# Altium PCB PCB1.PcbDoc
Units mm, origin at the board's own origin, x right, y up, seen from the top; angles counter-clockwise.
Board outline 152.4 x 101.6 mm, 2 copper layers (Top Layer, Bottom Layer); 47 components, 40 nets, 216 pads, 33 vias.
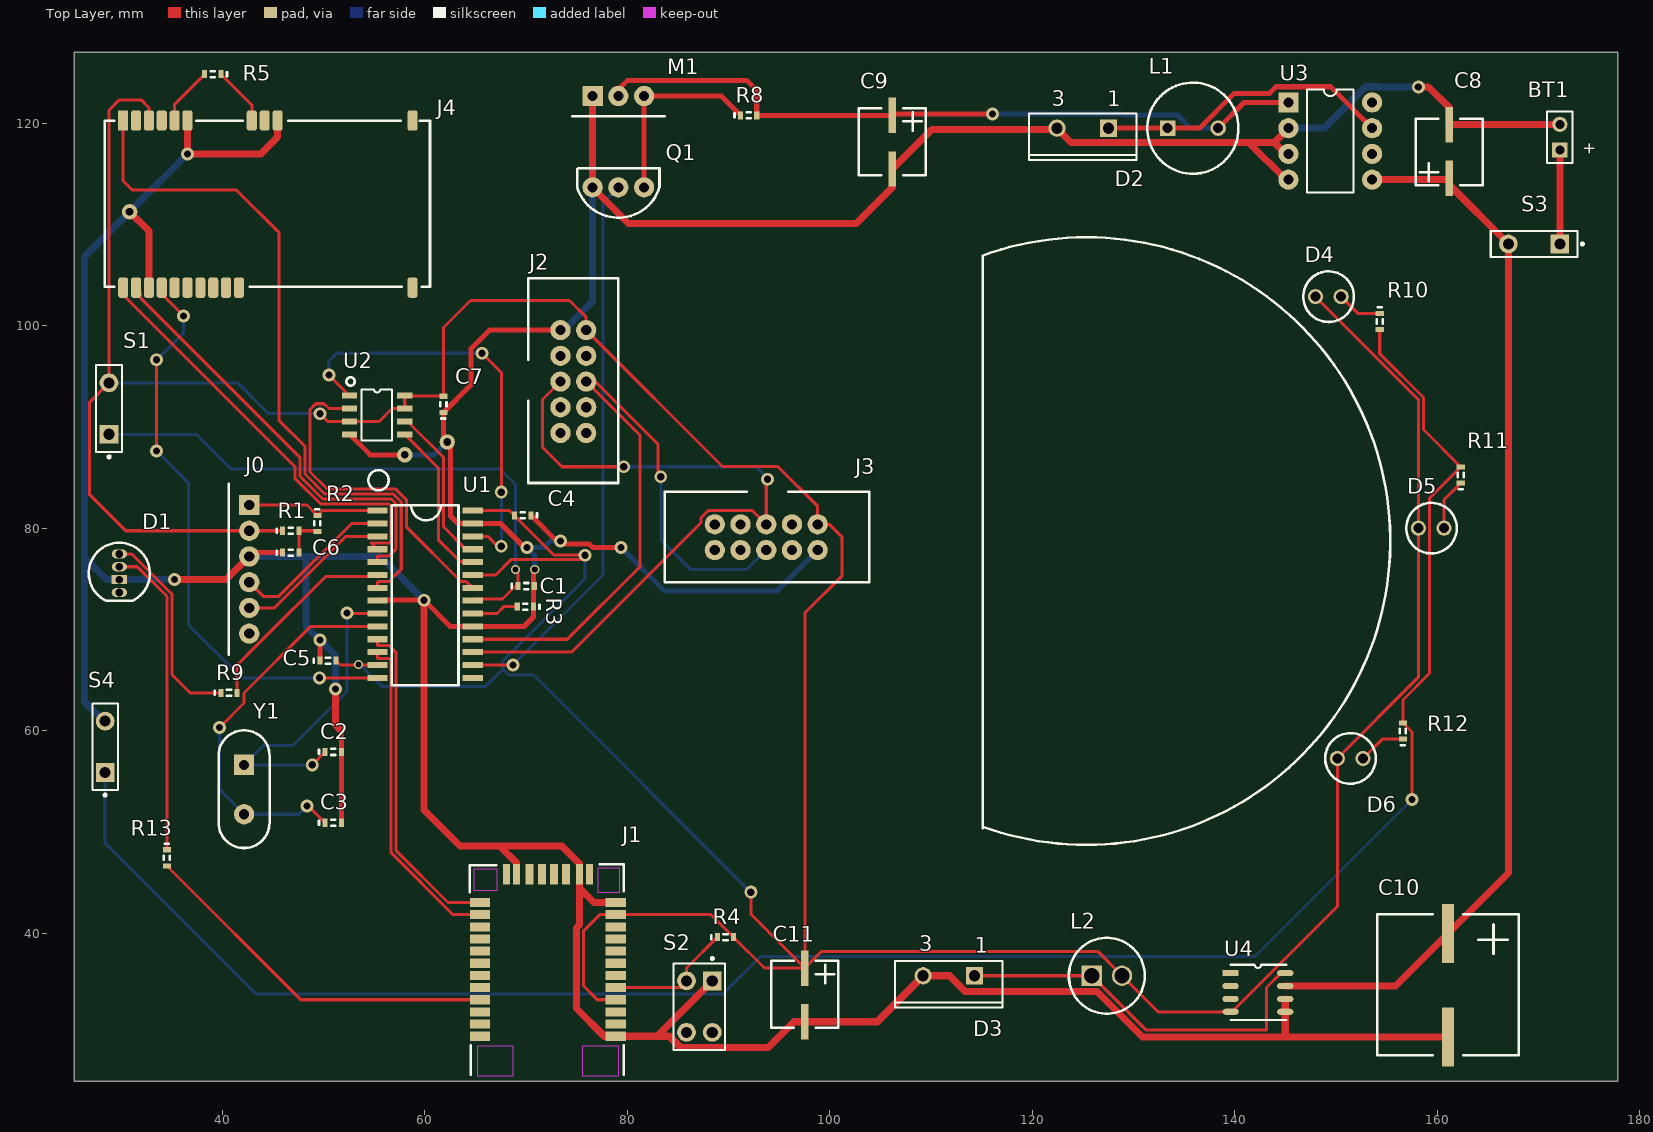
[diagram p0: Top Layer view]
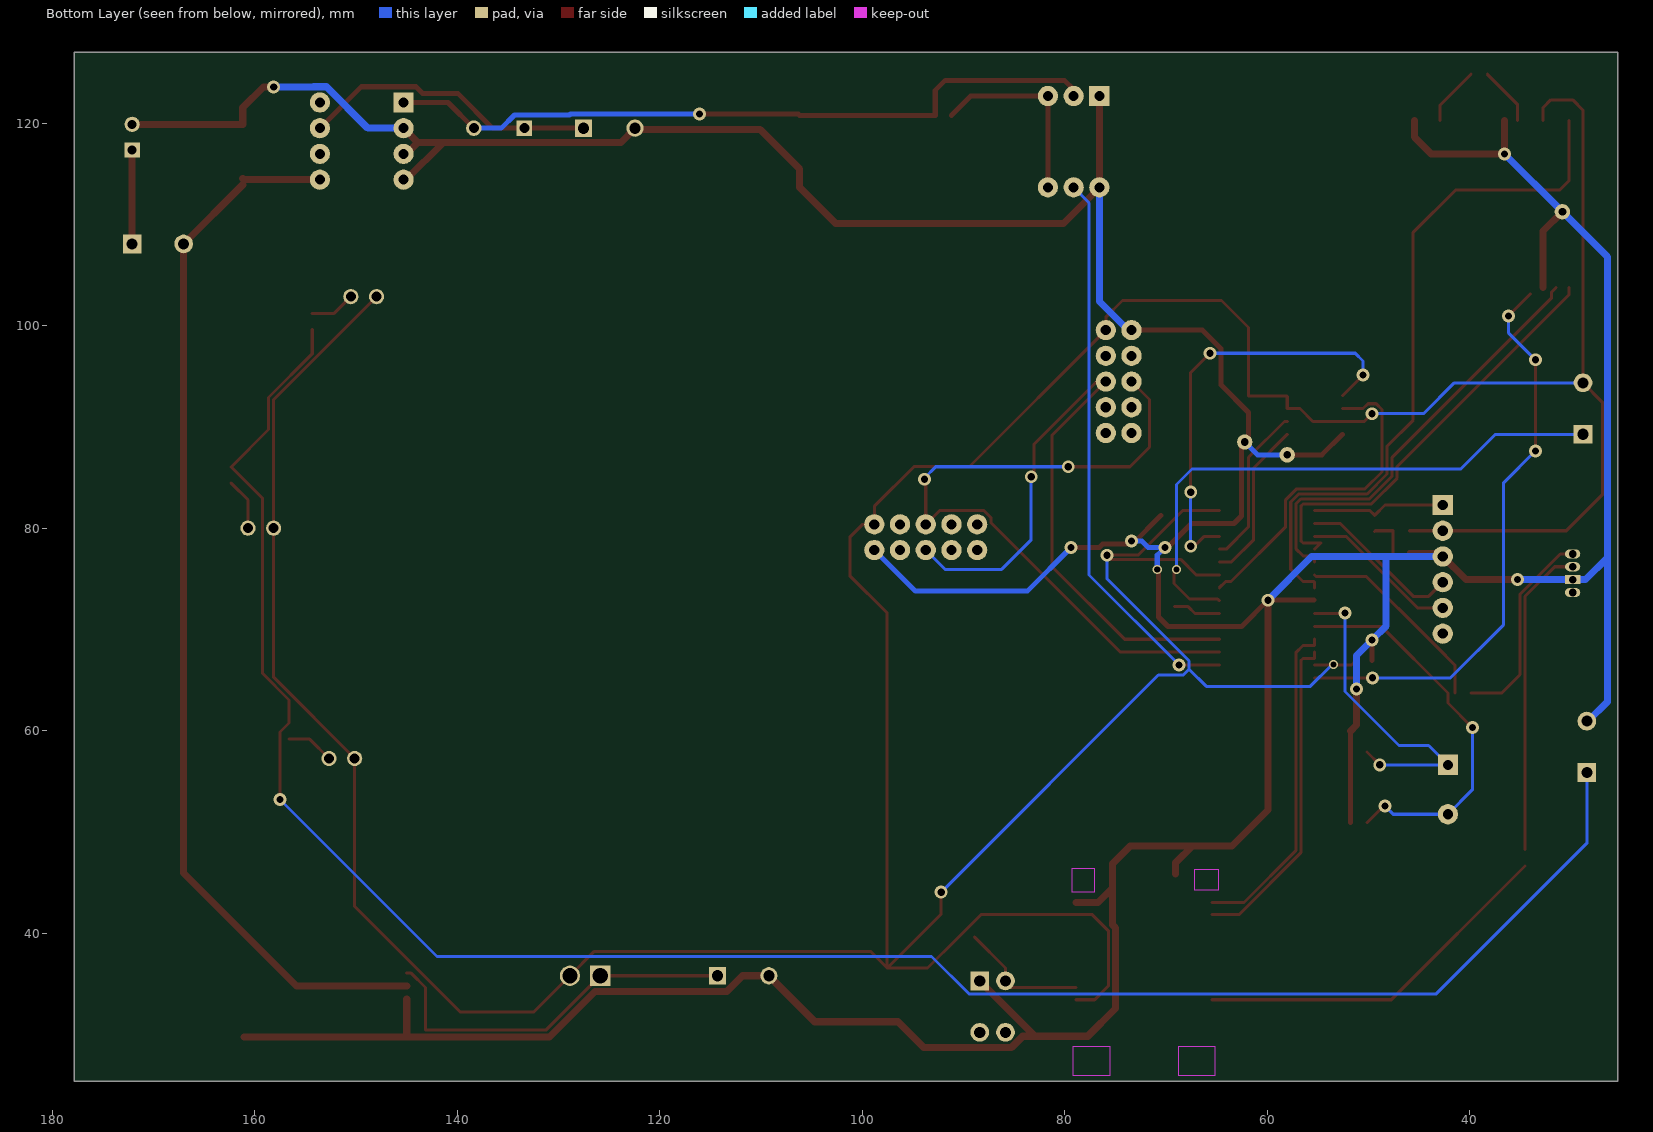
[diagram p1: Bottom Layer view, seen from below]

## Layer stack, top to bottom
Top Solder: solder mask 0.0102, Solder Resist, Dk 3.5
Top Layer: signal copper 0.0356
Dielectric 1: dielectric 0.32, FR-4, Dk 4.8
Bottom Layer: signal copper 0.0356
Bottom Solder: solder mask 0.0102, Solder Resist, Dk 3.5

## Board outline
25.4,25.4 177.8,25.4 177.8,127 25.4,127

## Design rules (kind name [scope] priority, off if disabled: settings)
Clearance [All] p1: gap=0.2
HoleSize [All] p1: absolutevalues=TRUE maxlimit=2.54 minlimit=0.3 maxpercent=80.000 minpercent=20.000
PolygonConnect [All] p1: connectstyle=Relief reliefconductorwidth=0.254 reliefentries=4 polygonreliefangle="90 Angle" airgapwidth=0.254
RoutingVias [All] p1: holewidth=0.711 width=1.27 viastyle="Through Hole" minholewidth=0.3 minwidth=1.27 maxholewidth=1 maxwidth=1.27
SilkToSilkClearance [All] p1: silktosilkclearance=0.2
SolderMaskExpansion [All] p1: expansion=0.102
UnpouredPolygon [All] p1: allowunpoured=FALSE
Width [All] p1: maxlimit=0.7 minlimit=0.2 preferedwidth=0.7
27 further rules are at their usual default settings.

## Classes and differential pairs
component class Accelerometer/Gyroscope/Magnetometer: J2 J3
component class Bluetooth: J1 R4 S2
component class Flash: C7 U2
component class GPS: J4 R5
component class "LED RGB": D1 D4 D5 D6 R9 R10 R11 R12 R13 S4
component class PIC32: C1 C2 C3 C4 C5 C6 J0 R1 R2 R3 S1 U1 Y1
component class POWER: BT1 C8 C9 C10 C11 D2 D3 L1 L2 S3 U3 U4
component class ServoMotor: M1 Q1 R8

## Components (designator, comment, footprint, x,y, rotation, side; value= is the part's Value field where it differs from the comment)
BT1 "6V" BAT-2 172.085,118.618 r90 top
C1 "10μF" own_0603 70.739,72.263 r180 top
C2 "15pF" own_0603 50.165,57.912 r0 top
C3 "15pF" own_0603 50.165,50.927 r0 top
C4 "0.1μF" own_0603 70.485,81.28 r180 top
C5 "0.1μF" own_0603 49.657,66.929 r0 top
C6 "0.1μF" own_0603 45.974,77.597 r0 top
C7 "100nF" own_0603 61.849,91.44 r90 top
C8 "Cin" SMT-FKS-V-D8 161.163,114.554 r180 top
C9 "Cout" SMT-FK-V-D8 106.172,120.777 r0 top
C10 "Cin" SMT-FK-V-H13 161.036,39.878 r0 top
C11 "Cout" SMT-FKS-V-D8 97.536,36.576 r0 top
D1 "L-154A4SUREQBFZGEW" L-154A4SUREQBFZGEW 29.845,73.66 r180 top
D2 "1N5817" TO-220AC 124.968,119.507 r180 top
D3 "1N5817" TO-220AC 111.76,35.814 r180 top
D4 "LED3" LED2.5 147.955,102.87 r0 top
D5 "LED3" LED2.5 158.115,80.01 r0 top
D6 "LED3" LED2.5 150.114,57.277 r0 top
J0 "Program / Debug" "C-Grid III X6" 42.672,82.296 r270 top
J1 "RN42" RN42 78.867,29.845 r180 top
J2 "MOD-MPU9150" "UEXT_MALE x10" 73.406,99.568 r0 top
J3 "MAG3110 Breakout" "UEXT_MALE x10" 98.806,80.391 r270 top
J4 "A2035-H" A2035-H 30.226,103.759 r90 top
L1 "Inductor" RLB0914 133.35,119.507 r0 top
L2 "Inductor" "2200R Series" 125.857,35.814 r0 top
M1 "SG90" "C-Grid III x3" 76.581,122.682 r0 top
Q1 "MOSFET-2N7000" 2N7000 81.661,113.665 r270 top
R1 "10k" own_0603 45.974,79.756 r0 top
R2 "1k" own_0603 49.403,81.28 r270 top
R3 "1k" own_0603 69.215,74.295 r0 top
R4 "10k" own_0603 88.9,39.624 r0 top
R5 "10K" own_0603 39.878,124.841 r180 top
R8 "5k" own_0603 91.186,120.777 r0 top
R9 "330" own_0603 39.878,63.754 r0 top
R10 "Res1" own_0603 154.305,101.219 r270 top
R11 "Res1" own_0603 162.306,84.455 r90 top
R12 "Res1" own_0603 156.591,59.182 r90 top
R13 "330" own_0603 34.544,48.26 r270 top
S1 "SW-PB" SPST-2 28.829,91.821 r90 top
S2 "Switch" DPST-4 87.122,32.766 r270 top
S3 "SW-SPST" SPST-2 169.545,108.077 r180 top
S4 "SW-SPST" SPST-2 28.448,58.42 r90 top
U1 "PIC32MX250F128B" PIC32MX250F128/SO 56.134,82.042 r270 top
U2 "LE25U40CMD" LE25U40CMDTWG 52.578,93.091 r0 top
U3 "LM2574N-5.0/NOPB" DIP8 145.288,122.047 r0 top
U4 "LM2594MX-3.3" SOP8 139.573,36.068 r0 top
Y1 "8MHz" 9B-8.000MAAJ-B 42.164,56.642 r270 top

## Footprints (in the part's own frame and the unit in brackets; to place one, negate y for a bottom-side part, rotate by r counter-clockwise, add the part's x,y. Pads: shape width x height; smd on the part's side, far side on the other; paste and mask are expansions set on the pad)
2N7000 [mm]
  round 2 hole 1: 1(0,0) 2(0,-2.54) 3(0,-5.08)
  silkscreen extent -1.9,-6.6 3,1.52
9B-8.000MAAJ-B [mm] "Quartz 8MHz"
  rect 2x2 hole 1: 1(0,0)
  round 2 hole 1: 2(4.88,0)
  silkscreen extent -3.41,-2.52 8.21,2.52
"2200R Series" [mm]
  rect 2x2 hole 1.5: 1(0,0)
  round 2 hole 1.5: 2(3,0)
  silkscreen extent -2.25,-3.75 5.25,3.75
A2035-H [mm]
  rect 2x1 smd: 1(16.51,0)
  rrect50% 2x1 smd: 2(16.51,-1.27) 3(16.51,-2.54) 4(16.51,-3.81) 5(16.51,-5.08) 6(16.51,-6.35) 7(16.51,-12.7) 8(16.51,-13.97) 9(16.51,-15.24) 10(16.51,-28.575) 11(0,-28.575) 12(0,-11.43) 13(0,-10.16) 14(0,-8.89) 15(0,-7.62) 16(0,-6.35) 17(0,-5.08) 18(0,-3.81) 19(0,-2.54) 20(0,-1.27) 21(0,0)
  silkscreen extent 0.1,-30.3 16.5,1.8
BAT-2 [mm] "Battery; 2 Leads"
  rect 1.5x1.5 hole 0.9: 1(-1.27,0)
  round 1.5 hole 0.9: 2(1.27,0)
  silkscreen extent -2.54,-1.27 2.54,1.27
"C-Grid III x3" [mm]
  rect 2x2 hole 1: 1(0,0)
  round 2 hole 1: 2(2.54,0) 3(5.08,0)
  silkscreen extent -2,-2 7.1,-2
"C-Grid III X6" [mm]
  rect 2x2 hole 1: 1(0,0)
  round 2 hole 1: 2(2.54,0) 3(5.08,0) 4(7.62,0) 5(10.16,0) 6(12.7,0)
  silkscreen extent -2.1,-2 14.8,-2
DIP8 [mm]
  rect 2x2 hole 1: 1(0,0)
  round 2 hole 1: 2(0,-2.54) 3(0,-5.08) 4(0,-7.62) 5(8.26,-7.62) 6(8.26,-5.08) 7(8.26,-2.54) 8(8.26,0)
  silkscreen extent 1.84,-8.89 6.43,1.27
DPST-4 [mm] "Switch; 4 Leads"
  rect 1.85x1.85 hole 1.1: 1(-2.54,1.27)
  round 1.85 hole 1.1: 2(-2.54,-1.27) 3(2.54,-1.27) 4(2.54,1.27)
  silkscreen extent -4.88,-2.54 4.28,2.54
L-154A4SUREQBFZGEW [mm] "LED RGB"
  oval 1.5x0.9 hole 0.762: 1(0,0) 3(0,-2.54) 4(0,-3.81)
  rect 1.5x0.9 hole 0.762: 2(0,-1.27)
  silkscreen extent -3.01,-4.91 3.01,0.82
LE25U40CMDTWG [mm]
  rect 1.5x0.6 smd: 1(0,0) 2(0,-1.27) 3(0,-2.54) 4(0,-3.81) 5(5.45,-3.81) 6(5.45,-2.54) 7(5.45,-1.27) 8(5.45,0)
  silkscreen extent -0.31,-4.44 4.2,1.81
LED2.5 [mm] "LED"
  round 1.5 hole 1: 1(0,0) 2(2.54,0)
  silkscreen extent -1.2,-2.5 3.8,2.5
own_0603 [mm] "0603_fp"
  rect 0.5x0.8 smd: 1(0,0) 2(1.6,0)
  silkscreen extent -0.6,-0.3 1,0.3
PIC32MX250F128/SO [mm]
  rect 0.6x2 smd: 1(0.3,-0.8) 2(1.57,-0.8) 3(2.84,-0.8) 4(4.11,-0.8) 5(5.38,-0.8) 6(6.65,-0.8) 7(7.92,-0.8) 8(9.19,-0.8) 9(10.46,-0.8) 10(11.73,-0.8) 11(13,-0.8) 12(14.27,-0.8) 13(15.54,-0.8) 14(16.81,-0.8) 15(16.81,8.6) 16(15.54,8.6) 17(14.27,8.6) 18(13,8.6) 19(11.73,8.6) 20(10.46,8.6) 21(9.19,8.6) 22(7.92,8.6) 23(6.65,8.6) 24(5.38,8.6) 25(4.11,8.6) 26(2.84,8.6) 27(1.57,8.6) 28(0.3,8.6)
  silkscreen extent -3.7,-1.7 17.55,7.2
RLB0914 [mil]
  rect 60x60 hole 39.37: 1(0,0)
  round 60 hole 39.37: 2(196.85,0)
  silkscreen extent -79,-177 276,177
RN42 [mm]
  rect 2x0.9 smd: 1(0,0) 2(0,-1.2) 3(0,-2.4) 4(0,-3.6) 5(0,-4.8) 6(0,-6) 7(0,-7.2) 8(0,-8.4) 9(0,-9.6) 10(0,-10.8) 11(0,-12) 12(0,-13.2) 13(13.4,-13.2) 14(13.4,-12) 15(13.4,-10.8) 16(13.4,-9.6) 17(13.4,-8.4) 18(13.4,-7.2) 19(13.4,-6) 20(13.4,-4.8) 21(13.4,-3.6) 22(13.4,-2.4) 23(13.4,-1.2) 24(13.4,0)
  rect 0.7x2 smd: 28(9.8,-16) 29(3.6,-16) 30(10.8,-16) 35(2.6,-16)
  rect 0.8x2 smd: 31(8.5,-16) 32(7.3,-16) 33(6.1,-16) 34(4.9,-16)
  Keep-Out Layer region: 10.1,1 13.7,1 13.7,3.9 10.1,3.9
  Keep-Out Layer region: -0.3,1 3.3,1 3.3,3.9 -0.3,3.9
  Keep-Out Layer region: 11.7,-16.5 14,-16.5 14,-14.4 11.7,-14.4
  Keep-Out Layer region: -0.4,-16.6 1.8,-16.6 1.8,-14.2 -0.4,-14.2
  silkscreen extent -0.8,-17 14.4,3.8
SMT-FK-V-D8 [mm]
  rect 0.75x3.5 smd: 1(0,0) 2(0,-5.3)
  silkscreen extent -3.3,-5.9 3.3,0.7
SMT-FK-V-H13 [mm]
  rect 1.2x5.8 smd: 1(0,0.1) 2(0,-10.1)
  silkscreen extent -7,-11.9 7,2
SMT-FKS-V-D8 [mm]
  rect 0.75x3.5 smd: 1(0,0) 2(0,-5.3)
  silkscreen extent -3.3,-5.9 3.3,0.7
SOP8 [mm]
  rect 1.6x0.6 smd: 1(0,0)
  oval 1.6x0.6 smd: 2(0,-1.27) 3(0,-2.54) 4(0,-3.81) 5(5.4,-3.81) 6(5.4,-2.54) 7(5.4,-1.27) 8(5.4,0)
  silkscreen extent 0,-4.6 5.5,0.83
SPST-2 [mm] "Switch; 2 Leads"
  rect 1.85x1.85 hole 1.1: 1(-2.54,0)
  round 1.85 hole 1.1: 2(2.54,0)
  silkscreen extent -4.89,-1.27 4.28,1.27
TO-220AC [mm] "TO, Thru-Hole, Vertical, Heatsink Mounted; 3 In-Line Leads (1 Absent); Pitch 2.54 mm"
  rect 1.7x1.7 hole 1.1: 1(-2.54,0)
  round 1.7 hole 1.1: 3(2.54,0)
  silkscreen extent -5.3,-1.45 5.3,3.15
"UEXT_MALE x10" [mm]
  round 2 hole 1: 1(0,0) 2(2.54,0) 3(0,-2.54) 4(2.54,-2.54) 5(0,-5.08) 6(2.54,-5.08) 7(0,-7.62) 8(2.54,-7.62) 9(0,-10.16) 10(2.54,-10.16)
  silkscreen extent -3.2,-15.1 5.7,5.1

## Part data
BT1: library part Battery, "4xAA"
C1 C2 C3 C4 C5 C6 C7: library part Cap, "Capacitor"
C8 C9 C10 C11: library part "Cap Pol1", "Polarized Capacitor (Radial)"
D1: "LED RGB"
D2 D3: library part "Diode 10TQ035", "Schottky Rectifier"
D4 D5 D6: "Typical BLUE SiC LED"
J0: library part ICSP
J1: "Bluetooth Module"
J2: "9-Axis"
J3: library part MOD-MAG3110
J4: "GPS Module"
M1: "Servo motor"
Q1: library part MOSFET-N, "N-Channel MOSFET"
R1 R2 R3 R4 R5 R8 R9 R13: library part Res1, "Resistor"
R10 R11 R12: "Resistor"
S1: "Switch"
S2: library part SW-PB, "Reset"
S3 S4: "Single-Pole, Single-Throw Switch"
U1: "Microcontrolleur"
U2: "Flash memory"
U3: "5V Buck converter"
U4: "3.3V Buck converter"
Y1: library part XTAL, "Crystal Oscillator"

## Free pads (board coordinates)
  round 1.524 hole 0.762: 2(30.861,111.252) 3(62.23,88.519) 4(58.039,87.249)

## Via types
v1: diameter 1.27, hole 0.711, Top Layer to Bottom Layer, 30 vias
v2: diameter 0.9, hole 0.6, Top Layer to Bottom Layer, 3 vias

## Nets (pads, with @x,y where several pads share a name; then routed paths per layer and width w, separated by ;. In a path a pad name is that pad's centre, name@x,y a point inside that pad or via, vN(x,y) a via of type N, cw(c..) or ccw(c..) an arc to the next point about the centre after c; other vN are vias at no path point)
GND: BT1.2 C1.1 C2.2 C3.2 C4.1 C5.1 C6.1 C7.1 C8.2 C9.2 C10.2 C11.2 D1.2 D2.3 D3.3 J0.3 J1.1 J1.12 J1.28 J1.29 J2.1 J3.2 J4.6 J4.9 J4.19 M1.1 pad.2 pad.3 pad.4 Q1.3 R3.2 S2.1 S4.2 U1.8 U1.19 U1.27 U2.4 U3.2 U3.3 U3.4 U4.5 U4.6 | length 565.7
  Top Layer w0.5: J0.3@43.053,77.597 C6.1 ; C5.1 v1(49.657,68.961) ; C3.2 C2.2 51.765,59.995 ; U2.4 54.61,87.249 pad.4 ; U1.8@55.38,72.898 v1(59.944,72.898) 62.53,70.312 U1.19 69.804,70.312 70.739,71.247 C1.1 70.739,75.819 v2(70.866,75.946) ; v1(70.104,78.105) 69.861,78.105 67.494,80.472 U1.27 63.292,80.472 62.549,81.215 62.549,87.995 61.849,88.695 C7.1 64.574,94.165 64.574,97.731 66.411,99.568 J2.1 ; C4.1 73.337,78.428 76.268,78.428 76.591,78.105 v1(79.375,78.105)
  Top Layer w0.7: pad.2 32.766,109.347 J4.19 ; v1(35.306,74.93) 40.386,74.93 J0.3 J0.3@43.053,77.597 ; J4.6 v1(36.576,116.967) 43.815,116.967 45.466,118.618 J4.9 ; v1(51.181,64.135) 51.181,60.579 51.765,59.995 ; v1(59.944,72.898) 59.944,52.197 63.5,48.641 67.399,48.641 ; J1.28 69.067,46.973 67.399,48.641 ; M1.1 Q1.3 80.137,110.109 102.616,110.109 106.172,113.665 C9.2 110.075,119.38 D2.3@122.301,119.38 ; J1.12 76.716,43.045 75.267,44.494 ; S2.1 82.931,29.845 ; D2.3 123.828,118.107 141.351,118.107 ; U4.6 U4.5 144.969,32.254 144.969,29.78 ; U3.3@145.028,116.967 143.888,118.107 ; U3.4@145.031,114.427 141.351,118.107 ; U3.2 143.888,118.107 ; v1(158.115,123.571) 159.131,123.571 161.163,121.539 C8.2 172.051,119.854 BT1.2 ; C10.2 161.034,29.78 144.969,29.78 ; 67.399,48.641 73.533,48.641 75.267,46.907 J1.29 75.267,44.494 ; 75.267,44.494 75.267,40.824 74.992,40.549 74.992,32.577 77.724,29.845 J1.1 82.931,29.845 ; 82.931,29.845 84.147,29.845 85.241,28.751 93.931,28.751 96.456,31.276 C11.2 104.682,31.276 D3.3 111.822,35.814 113.372,34.264 126.391,34.264 130.875,29.78 144.969,29.78 ; 141.351,118.107 143.888,118.107
  Bottom Layer w0.5: pad.4 60.96,87.249 pad.3 ; v2(70.866,75.946) 70.866,77.343 v1(70.104,78.105) 71.755,78.105 72.39,78.74 v1(73.406,78.74) ; v1(79.375,78.105) 83.693,73.787 94.742,73.787 J3.2
  Bottom Layer w0.7: S4.2 28.321,60.96 26.416,62.865 26.416,77.089 ; v1(35.306,74.93) D1.2 28.575,74.93 26.416,77.089 ; v1(36.576,116.967) pad.2 26.416,106.807 26.416,77.089 ; J0.3 48.26,77.216 ; v1(51.181,64.135) 51.181,67.437 v1(49.657,68.961) 48.26,70.358 48.26,77.216 ; v1(59.944,72.898) 55.626,77.216 48.26,77.216 ; J2.1@73.914,99.568 73.914,99.728 76.581,102.395 Q1.3 ; D3.3 D3.3@109.347,35.687 ; U3.2 148.816,119.507 152.906,123.597 154.19,123.597 154.216,123.571 v1(158.115,123.571)
"MAIN BUTTON": R3.1 S1.1 U1.21 | length 57.3
  Top Layer w0.3: U1.21 64.907,73.025 67.691,73.025 69.215,74.549 69.215,75.692 v2(68.961,75.946)
  Bottom Layer w0.3: S1.1 37.465,89.281 40.894,85.852 67.437,85.852 68.961,84.328 v2(68.961,75.946)
MCLR: J0.1 R2.1 U1.1 | length 13.3
  Top Layer w0.3: J0.1 48.387,82.296 R2.1 49.865,81.742 U1.1
NetBT1_1: BT1.1 S3.1 | length 9.3
  Top Layer w0.7: S3.1 BT1.1
NetC1_2: C1.2 U1.20 | length 4.7
  Top Layer w0.3: U1.20 67.137,71.582 67.818,72.263 C1.2
NetC6_2: C6.2 R1.2 R2.2 | length 4
  Top Layer w0.3: C6.2 R1.2 49.327,79.756 R2.2
NetC8_1: C8.1 C10.1 S3.2 U3.5 U4.7 | length 105.3
  Top Layer w0.254: C8.1@161.163,113.919 C8.1
  Top Layer w0.7: U4.7 155.856,34.798 C10.1 167.005,45.947 S3.2 C8.1@161.163,113.919 ; U3.5 161.036,114.427 C8.1
NetD1_3: D1.3 R13.1 | length 30.9
  Top Layer w0.3: D1.3 31.623,76.2 34.544,73.279 R13.1
NetD1_4: D1.4 R9.1 | length 20.4
  Top Layer w0.3: D1.4 31.06,77.47 35.044,73.486 35.044,65.54 36.83,63.754 R9.1
NetD2_1: D2.1 L1.1 U3.7 | length 29.4
  Top Layer w0.5: D2.1 L1.1 136.495,119.507 139.935,122.947 143.41,122.947 144.06,123.597 149.458,123.597 U3.7
NetD3_1: D3.1 L2.1 U4.8 | length 37.6
  Top Layer w0.3: D3.1 L2.1 131.191,30.48 143.129,30.48 143.129,34.656 144.541,36.068 U4.8
NetD4_2: D4.2 R10.1 | length 4.5
  Top Layer w0.3: D4.2 152.146,101.219 R10.1
NetD5_2: D5.2 R11.1 | length 5.1
  Top Layer w0.3: D5.2 160.655,82.804 R11.1
NetD6_2: D6.2 R12.1 | length 4.7
  Top Layer w0.3: D6.2 154.559,59.182 R12.1
NetJ1_5: J1.5 R4.1 S2.2 | length 12.8
  Top Layer w0.3: J1.5 85.191,34.645 S2.2 85.852,36.576 R4.1
NetJ1_13: J1.13 U1.11 | length 32.7
  Top Layer w0.3: U1.11 55.334,68.422 56.479,68.422 57.184,67.717 57.184,48.171 62.31,43.045 J1.13
NetJ1_14: J1.14 U1.12 | length 32.4
  Top Layer w0.3: U1.12 55.334,67.152 56.479,67.152 56.684,66.947 56.684,47.964 62.803,41.845 J1.14
NetJ1_21: J1.21 R13.2 | length 36.4
  Top Layer w0.3: R13.2 47.759,33.445 J1.21
NetJ2_5: J2.5 J3.5 U1.17 | length 71
  Top Layer w0.3: U1.17 74.503,67.772 87.296,80.565 87.296,81.073 87.964,81.741 92.376,81.741 J3.5 v1@93.726,84.963 ; J2.5 71.628,92.71 71.628,88.011 73.564,86.075 v1(79.66,86.075)
  Bottom Layer w0.3: v1(79.66,86.075) 92.741,86.075 93.853,84.963 v1(93.853,84.836)
NetJ2_6: J2.6 J3.6 U1.18 | length 71
  Top Layer w0.3: U1.18 74.087,69.042 81.28,76.235 81.28,89.154 J2.6 76.835,94.488 83.058,88.265 v1@83.058,85.344
  Bottom Layer w0.3: v1@83.312,84.836 83.312,78.867 86.233,75.946 91.821,75.946 J3.6
  other v1: 83.312,85.09
NetJ4_1: J4.1 U1.7 | length 69.1
  Top Layer w0.3: J4.1 30.226,114.3 31.115,113.411 41.402,113.411 45.593,109.22 45.593,90.678 48.172,88.099 48.172,85.36 50.14,83.392 56.893,83.392 57.684,82.601 57.684,75.947 56.479,74.742 55.391,74.742 55.334,74.685 U1.7
NetJ4_5: J4.5 R5.2 | length 5.8
  Top Layer w0.3: J4.5 35.306,121.869 R5.2
NetJ4_7: J4.7 R5.1 | length 5.8
  Top Layer w0.3: R5.1 42.926,121.793 J4.7
NetJ4_18: J4.18 U1.14 | length 56.8
  Top Layer w0.3: v1(33.528,87.63) v1(33.528,96.647) ; J4.18@34.036,103.124 v1(36.195,100.965) ; v1(49.611,65.232) U1.14
  Bottom Layer w0.3: v1(33.528,87.63) 36.657,84.501 36.657,70.485 41.91,65.232 v1(49.611,65.232) ; v1(33.528,96.647) 36.195,99.314 v1(36.195,100.965)
NetJ4_20: J4.20 U1.5 | length 43.1
  Top Layer w0.3: J4.20 31.916,103.339 31.916,102.76 47.672,87.004 47.672,85.153 49.933,82.892 56.686,82.892 57.184,82.394 57.184,77.987 56.479,77.282 55.334,77.282 U1.5
NetJ4_21: J4.21 U1.4 | length 42.8
  Top Layer w0.3: J4.21 30.226,103.04 47.172,86.094 47.172,84.946 49.726,82.392 56.479,82.392 56.684,82.187 56.684,78.757 56.479,78.552 54.714,78.552 U1.4
NetM1_3: M1.3 Q1.1 R8.1 | length 19.3
  Top Layer w0.5: Q1.1 M1.3 89.281,122.682 R8.1
NetQ1_2: Q1.2 U1.16 | length 55.6
  Top Layer w0.3: U1.16 v1(68.707,66.502) v1@68.88,66.502
  Bottom Layer w0.3: v1(68.707,66.502) 77.597,75.392 77.597,112.141 Q1.2
NetR9_2: R9.2 U1.6 | length 20.3
  Top Layer w0.3: R9.2 41.478,66.497 43.227,68.246 43.231,68.246 44.022,69.037 44.022,69.041 50.216,75.235 55.177,75.235 U1.6
NetR10_2: R10.2 R11.2 R12.2 S4.1 | length 202.6
  Top Layer w0.3: R10.2 154.305,97.227 158.615,92.917 158.615,89.746 R11.2 159.215,82.964 159.215,65.671 156.591,63.047 R12.2 157.48,59.893 v1(157.48,53.213)
  Bottom Layer w0.3: S4.1 28.448,48.895 43.312,34.031 89.462,34.031 93.15,37.719 141.986,37.719 v1(157.48,53.213)
NetU1_22: U1.22 U2.2 | length 32.9
  Top Layer w0.3: U2.2 50.542,91.821 50.065,92.298 49.249,92.298 48.672,91.721 48.672,85.567 50.347,83.892 57.1,83.892 58.184,82.808 58.184,80.147 63.589,74.742 64.114,74.742 U1.22
NetU1_24: U1.24 U2.5 | length 16.1
  Top Layer w0.3: U2.5 61.349,85.96 61.349,78.867 63.554,76.662 U1.24
NetU1_25: U1.25 U2.6 | length 16
  Top Layer w0.3: U2.6 58.303,90.551 61.849,87.005 61.849,80.137 64.054,77.932 U1.25
NetU1_26: U1.26 U2.1 | length 42.6
  Top Layer w0.3: v1(50.546,95.123) U2.1 ; U1.26 66.213,79.202 v1@67.31,78.105 ; v1(65.659,97.282) 67.564,95.377 v1(67.564,83.566)
  Bottom Layer w0.3: v1(50.546,95.123) 50.546,96.52 51.308,97.282 v1(65.659,97.282) ; v1(67.564,78.232) v1(67.564,83.566)
OSC1: C2.1 U1.9 Y1.1 | length 32.1
  Top Layer w0.3: v1(48.895,56.642) C2.1 ; v1@52.624,71.582 U1.9
  Bottom Layer w0.3: v1(48.895,56.642) Y1.1 44.069,58.547 46.99,58.547 52.324,63.881 v1(52.324,71.628)
OSC2: C3.1 U1.10 Y1.2 | length 38.9
  Top Layer w0.3: v1(39.751,60.325) 42.164,62.738 42.164,63.733 48.743,70.312 U1.10 ; v1(48.387,52.578) 48.514,52.578 C3.1
  Bottom Layer w0.3: v1(39.751,60.325) 39.751,54.175 Y1.2 47.571,51.762 v1(48.387,52.578)
PGEC: J0.5 U1.3 | length 15.6
  Top Layer w0.3: J0.5 45.157,72.136 52.223,79.202 U1.3
PGED: J0.4 U1.2 | length 16.2
  Top Layer w0.3: J0.4 44.069,73.279 45.593,73.279 52.786,80.472 U1.2
V3P3: C4.2 C5.2 C7.2 C11.1 D4.1 D5.1 D6.1 J0.2 J1.4 J1.11 J2.2 J3.1 J4.3 L2.2 R1.1 R4.2 S1.2 U1.13 U1.23 U1.28 U2.3 U2.7 U2.8 U4.4 | length 468
  Top Layer w0.3: J4.3 32.766,121.539 32.004,122.301 29.845,122.301 28.829,121.285 S1.2 26.924,92.456 26.924,83.312 30.48,79.756 J0.2 R1.1 ; v1(49.657,91.313) 50.419,90.551 U2.3 55.499,90.551 56.769,91.821 U2.7 58.028,92.989 58.079,93.04 C7.2 61.849,99.822 64.516,102.489 74.295,102.489 75.946,100.838 J2.2 89.408,86.106 94.869,86.106 98.806,82.169 J3.1 99.949,80.391 101.219,79.121 101.219,75.311 97.536,71.628 C11.1 ; C5.2 51.684,66.502 U1.13 ; U1.23 67.014,75.392 68.553,76.931 v1@75.407,76.931 ; U1.28 68.372,81.742 72.771,77.343 v1(75.819,77.343) ; J1.4 77.045,33.445 75.692,34.798 75.692,40.259 77.278,41.845 J1.11 88.279,41.845 R4.2 93.548,36.576 C11.1 ; v1(92.202,44.069) 92.202,41.91 C11.1 ; D4.1 158.115,92.71 D5.1 158.115,65.278 D6.1 150.114,42.65 139.722,32.258 U4.4 132.413,32.258 L2.2 126.444,38.227 99.187,38.227 C11.1
  Bottom Layer w0.3: S1.2 41.529,94.361 44.577,91.313 v1(49.657,91.313) ; v2@53.657,66.484 55.753,64.389 66.017,64.389 67.722,66.094 ; v1(75.819,77.343) 75.819,75.007 67.722,66.91 67.722,66.094 ; v1(92.202,44.069) 70.754,65.517 68.299,65.517 67.722,66.094
  other v2: 53.467,66.548
V5: C9.1 L1.2 M1.2 R8.2 U3.1 | length 71.8
  Top Layer w0.5: M1.2@79.121,123.317 80.036,124.232 91.795,124.232 92.786,123.241 R8.2 C9.1 ; C9.1@106.299,120.904 v1(116.078,120.904) ; L1.2 140.89,122.047 U3.1
  Top Layer w0.7: M1.2 M1.2@79.121,123.317
  Bottom Layer w0.5: v1(116.078,120.904) 121.845,120.904 121.848,120.907 128.82,120.907 128.908,120.819 134.34,120.819 135.652,119.507 L1.2
  Bottom Layer w0.7: v1@115.824,120.904 v1(116.078,120.904)
pads on no net: D1.1 J0.6 J1.2 J1.3 J1.6 J1.7 J1.8 J1.9 J1.10 J1.15 J1.16 J1.17 J1.18 J1.19 J1.20 J1.22 J1.23 J1.24 J1.30 J1.31 J1.32 J1.33 J1.34 J1.35 J2.3 J2.4 J2.7 J2.8 J2.9 J2.10 J3.3 J3.4 J3.7 J3.8 J3.9 J3.10 J4.2 J4.4 J4.8 J4.10 J4.11 J4.12 J4.13 J4.14 J4.15 J4.16 J4.17 S2.3 S2.4 U1.15 U3.6 U3.8 U4.1 U4.2 U4.3

## Silkscreen, mask and mechanical layers (free items; w line width, h text height)
Top Overlay:
  lines w0.254: 115.088,50.393 115.088,106.931 cw(c125.349,78.74) 115.088,50.549

## Text inside footprints (layer, text, board x,y; h text height)
BT1: Top Overlay "+" at 175.514,116.84 h1.15 r90
D2: Top Overlay "3" at 121.92,121.666 h1.5; Top Overlay "1" at 127.381,121.666 h1.5
D3: Top Overlay "3" at 108.839,38.227 h1.5; Top Overlay "1" at 114.3,38.1 h1.5